# EAGLE board BatteryCharging (EAGLE 9.4.2)
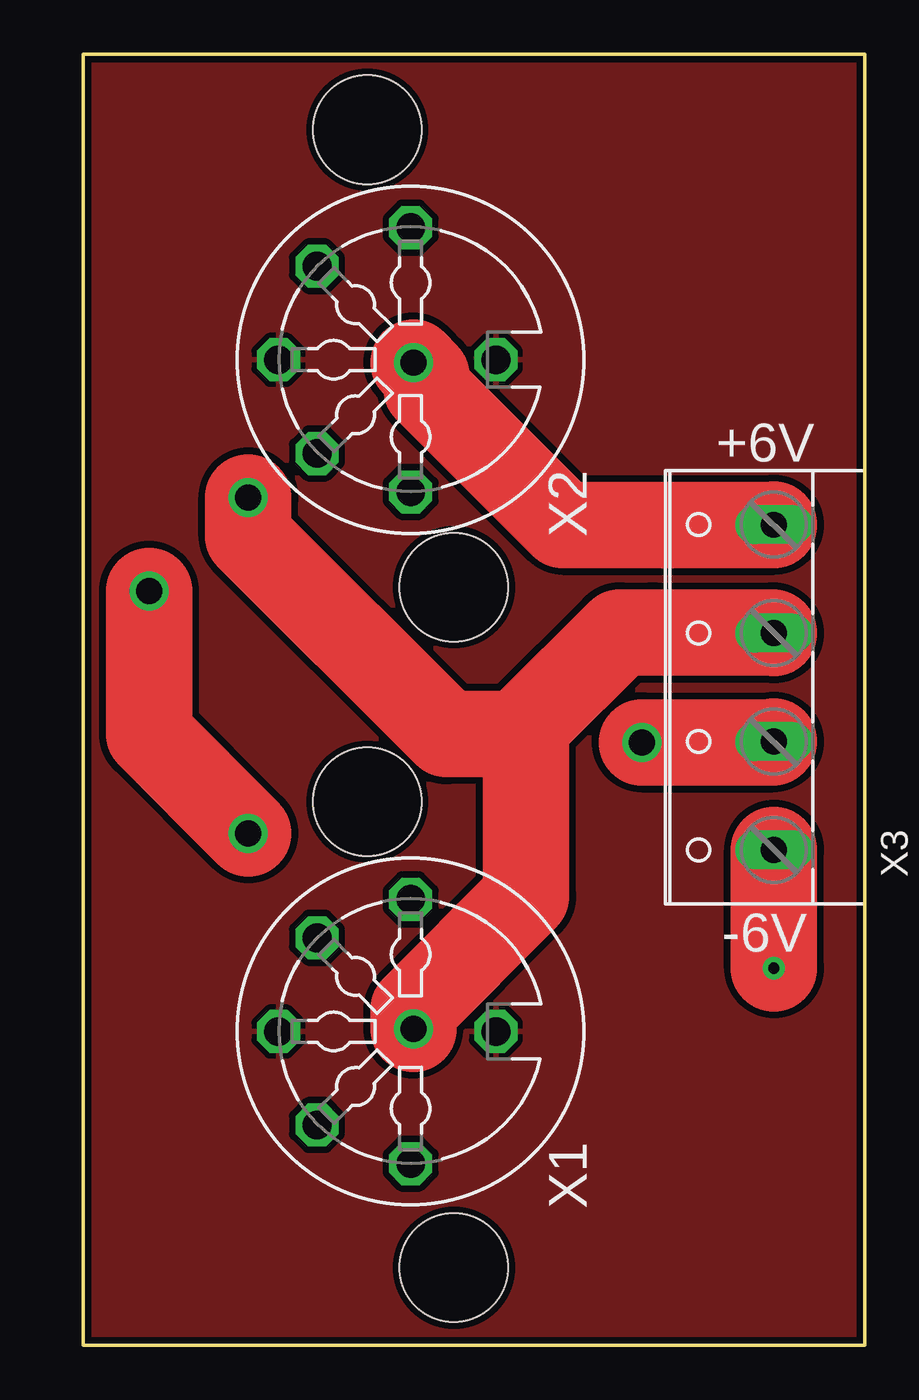
[diagram p0: board, top side]
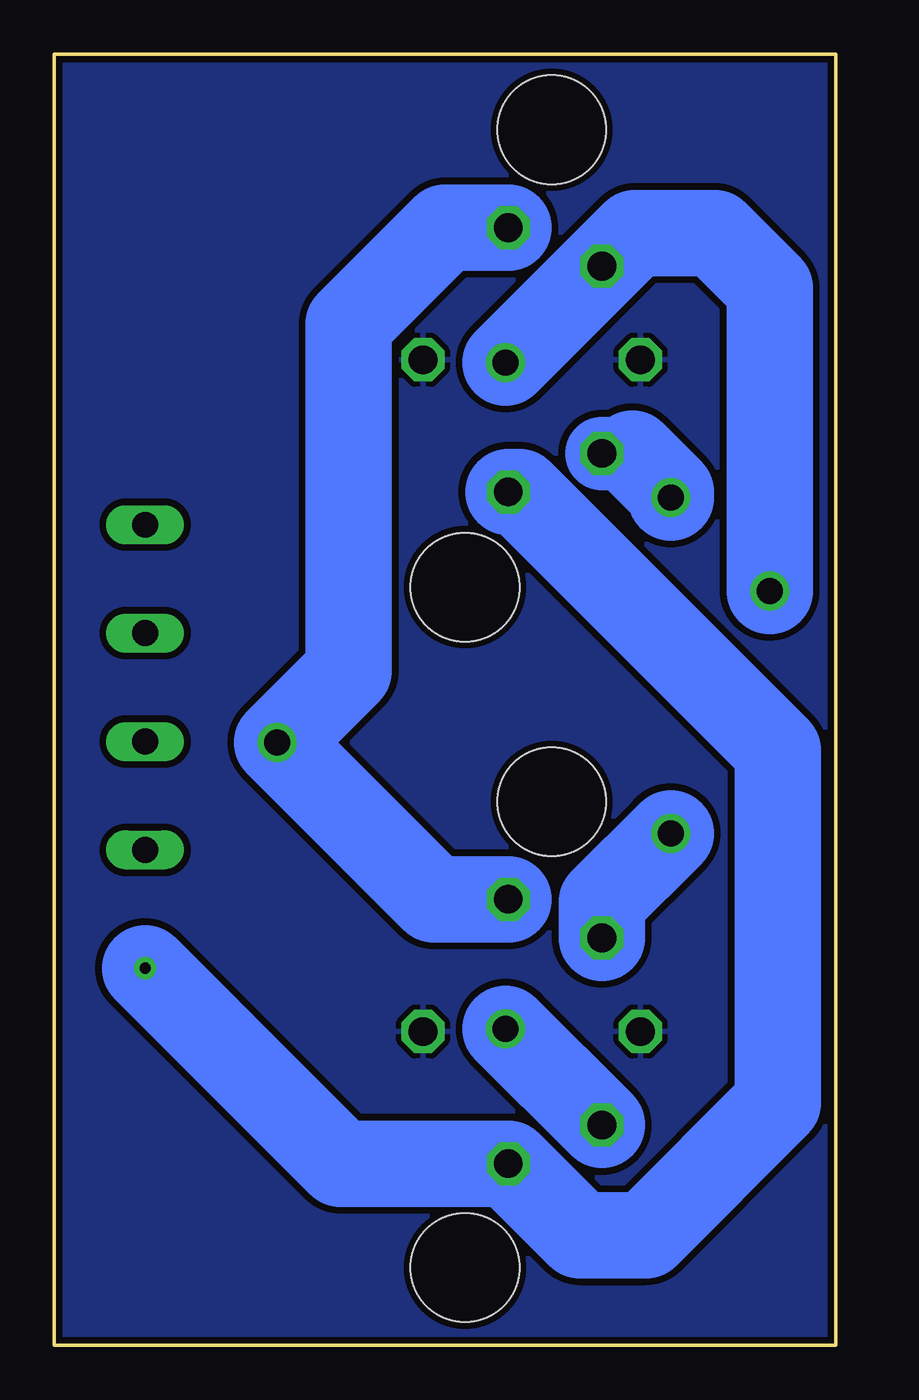
[diagram p1: board, bottom side, seen from below]

Size 36.07 x 59.56 mm. Coordinates in mm from the lower left corner, seen from the top.
Outline: 0,0 0,59.56 36.07,59.56 36.07,0 0,0
Copper layers (1*16): Top 0.035mm / dielectric 1.5mm / Bottom 0.035mm
Design rules "SparkFun": minimum track width 8mil, minimum drill 20mil, track to track 8mil, track to pad 8mil, pad to pad 8mil, via to via 8mil, smd to smd 8mil, copper to edge 8mil, drill to drill 8mil, minimum pad ring 12mil, minimum via ring 10mil, stop-mask expansion 4mil, vias tented up to drill 20mil, thermal gap 10mil
Holes 5 mm at 17.11,3.58 13.11,25.08 17.11,34.98 13.11,56.08

## Footprints (pad centres in the part's own frame; a part is rotated, then mirrored left to right if it is on the bottom)
MAB5SV = drill 1.321 octagon: 1 6.096,0; 2 0,-6.096; 3 -6.096,0; 4 4.318,-4.318; 5 -4.318,-4.318; PE 0,3.937
W237-4 = drill 1.194 long: 1 -7.5,-1.27; 2 -2.5,-1.27; 3 2.5,-1.27; 4 7.5,-1.27

## Placement (x,y rotation side)
X1  MAB5SV  [MAB5SV]  15.11,14.48 270 top
X2  MAB5SV  [MAB5SV]  15.11,45.47 270 top
X3  [W237-4]  30.61,30.35 90 top

## Library data of the parts
X1 X2 = con-hirschmann; OC_FARNELL: unknown; OC_NEWARK: unknown
X3 = con-wago-500; OC_FARNELL: unknown; OC_NEWARK: unknown

## Nets
+0V: X1.4 X2.4 X3.3
+6V: X1.5 X2.5 X3.4
-0V: X1.3 X2.3 X3.2
-6V: X1.1 X2.1 X3.1
GND: X1.2 X1.PE X2.2 X2.PE

## Tracks (layer width: path | path; a pad name or v marks a point on that pad's centre or on a via)
+0V  (via drill 1.2)
  Top 4: v15.24,14.61 15.24,15.49 20.45,20.7 20.45,28.19 | 20.45,28.19 20.45,28.57 24.77,32.89 26.29,32.89 31.84,32.89 X3.3 | 20.45,28.19 16.76,28.19 7.62,37.34 v7.62,39.12
  Bottom 3.4: X2.4 9.4,41.15
  Bottom 4: X1.4 v15.24,14.61 | 9.4,41.15 7.62,39.37 v7.62,39.12
+6V  (via drill 1.2)
  Top 4: v7.62,23.62 3.05,28.19 v3.05,34.8 | v15.24,45.34 15.86,44.72 15.86,44.14 22.15,37.85 X3.4
  Bottom 4: X1.5 10.8,20.45 v7.62,23.62 | v3.05,34.8 3.05,48.77 5.59,51.31 9.27,51.31 X2.5 v15.24,45.34
-0V  (via drill 1.2)
  Top 4: v25.78,27.81 31.84,27.81 X3.2
  Bottom 4: X2.3 18.03,51.56 22.48,47.12 22.48,31.11 v25.78,27.81 18.54,20.57 X1.3
-6V  (via drill 0.51)
  Top 4: v31.88,17.4 X3.1
  Bottom 4: X2.1 14.61,39.37 2.67,27.43 2.67,11.18 8.76,5.08 11.81,5.08 X1.1 22.86,8.38 v31.88,17.4
GND
  pour Top (isolate 0.305): 0,59.56 36.07,59.56 36.07,0 0,0
  pour Bottom (isolate 0.305): 0,59.56 36.07,59.56 36.07,0 0,0

## Text on the board
tPlace: +6V | -6V